# Altium PCB manip-cam-mod-pcb.PcbDoc
Units mm, origin at the board's own origin, x right, y up, seen from the top; angles counter-clockwise.
Board outline 40 x 40 mm, 4 copper layers (Top Layer, Ground Plane, Power Plane, Bottom Layer), stack 0.844 mm thick; 31 components, 17 nets, 242 pads, 25 vias.
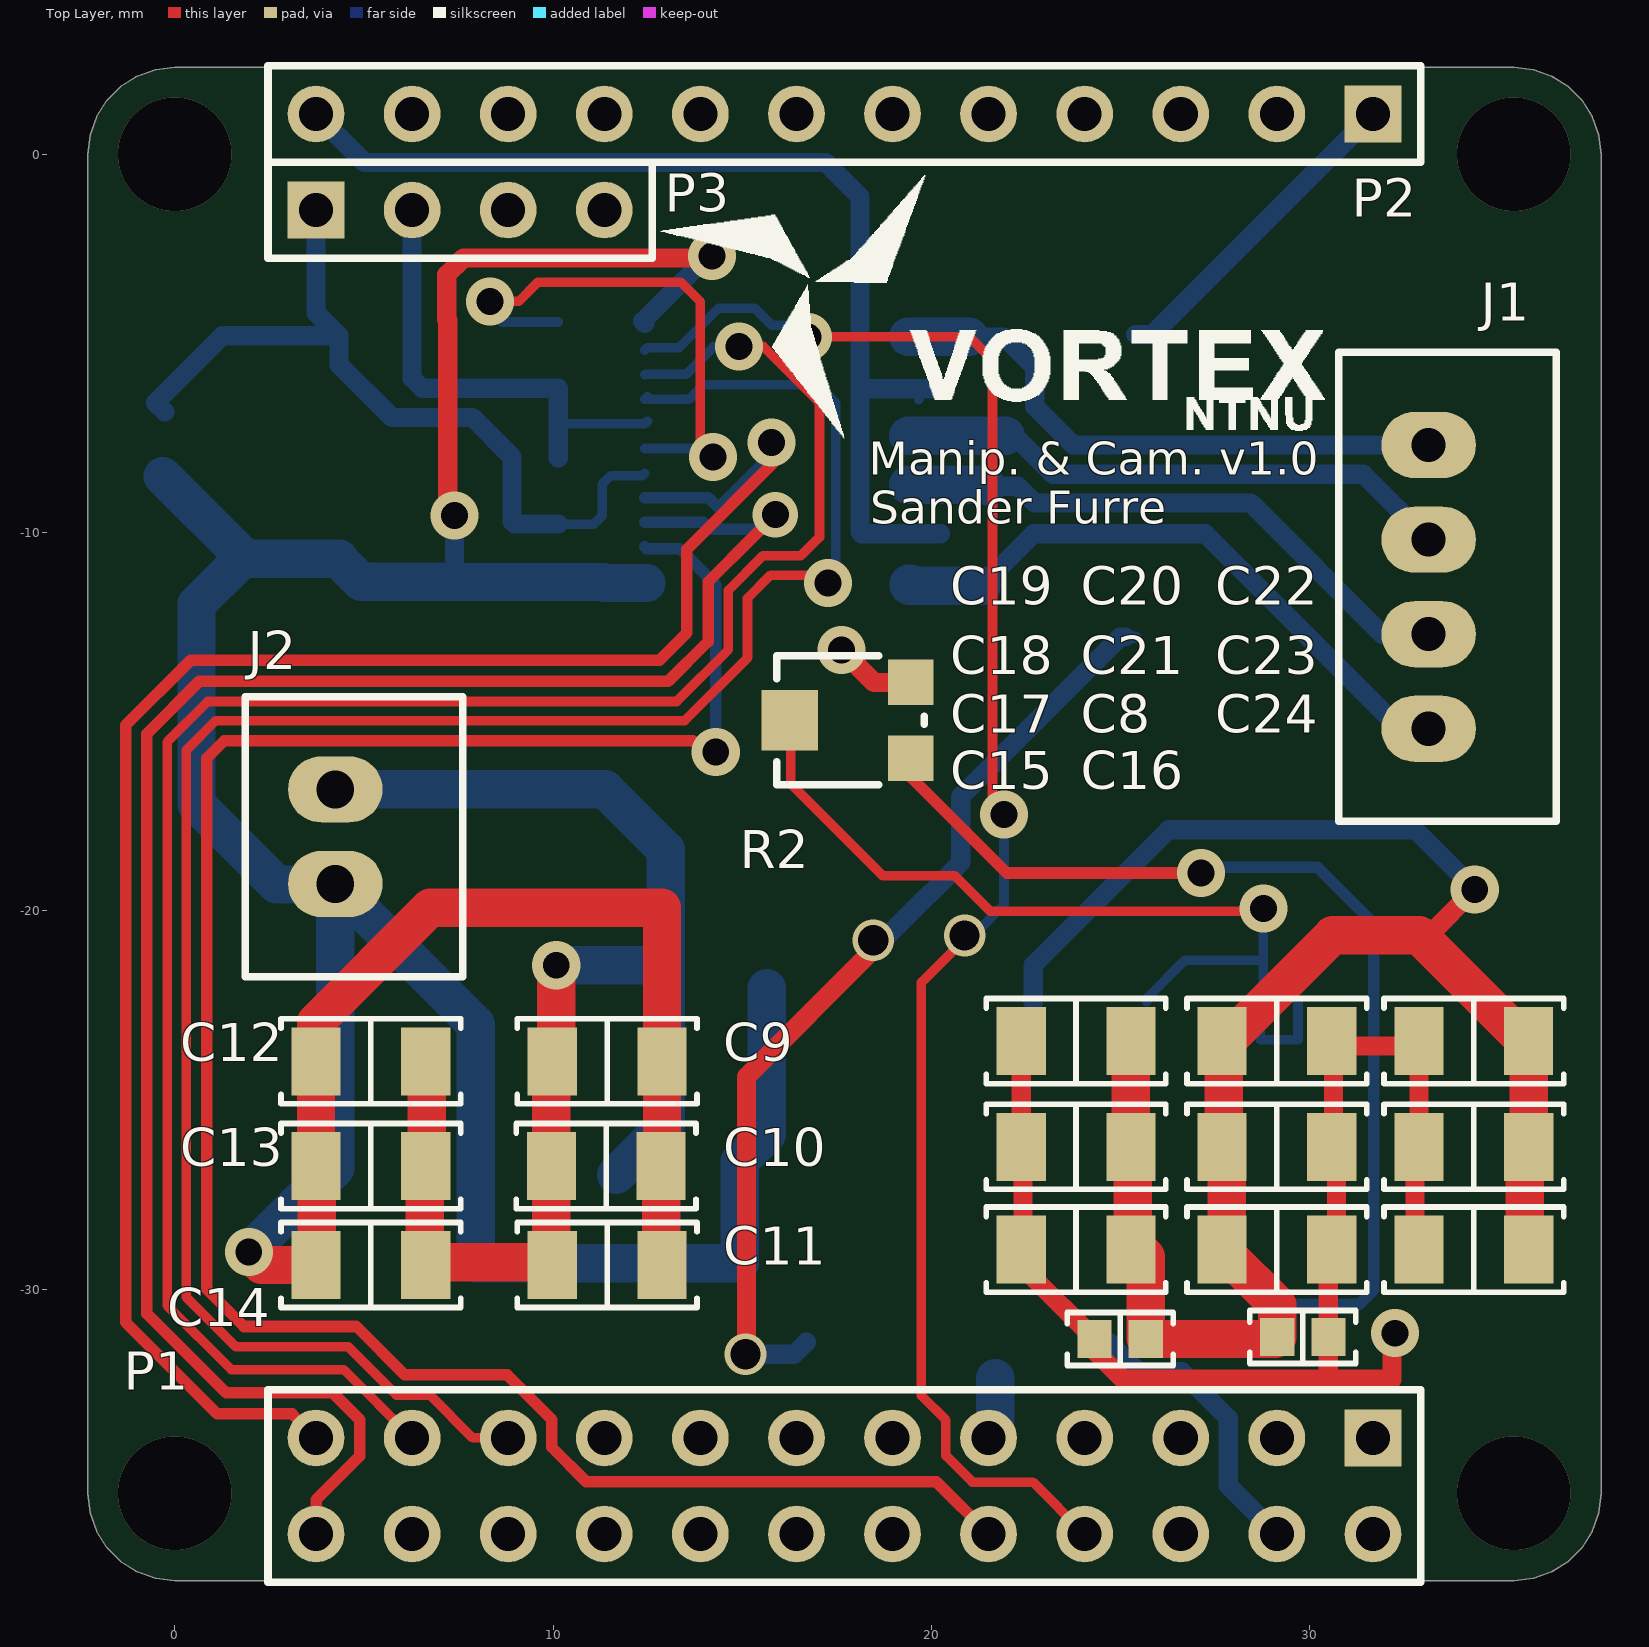
[diagram p0: Top Layer view]
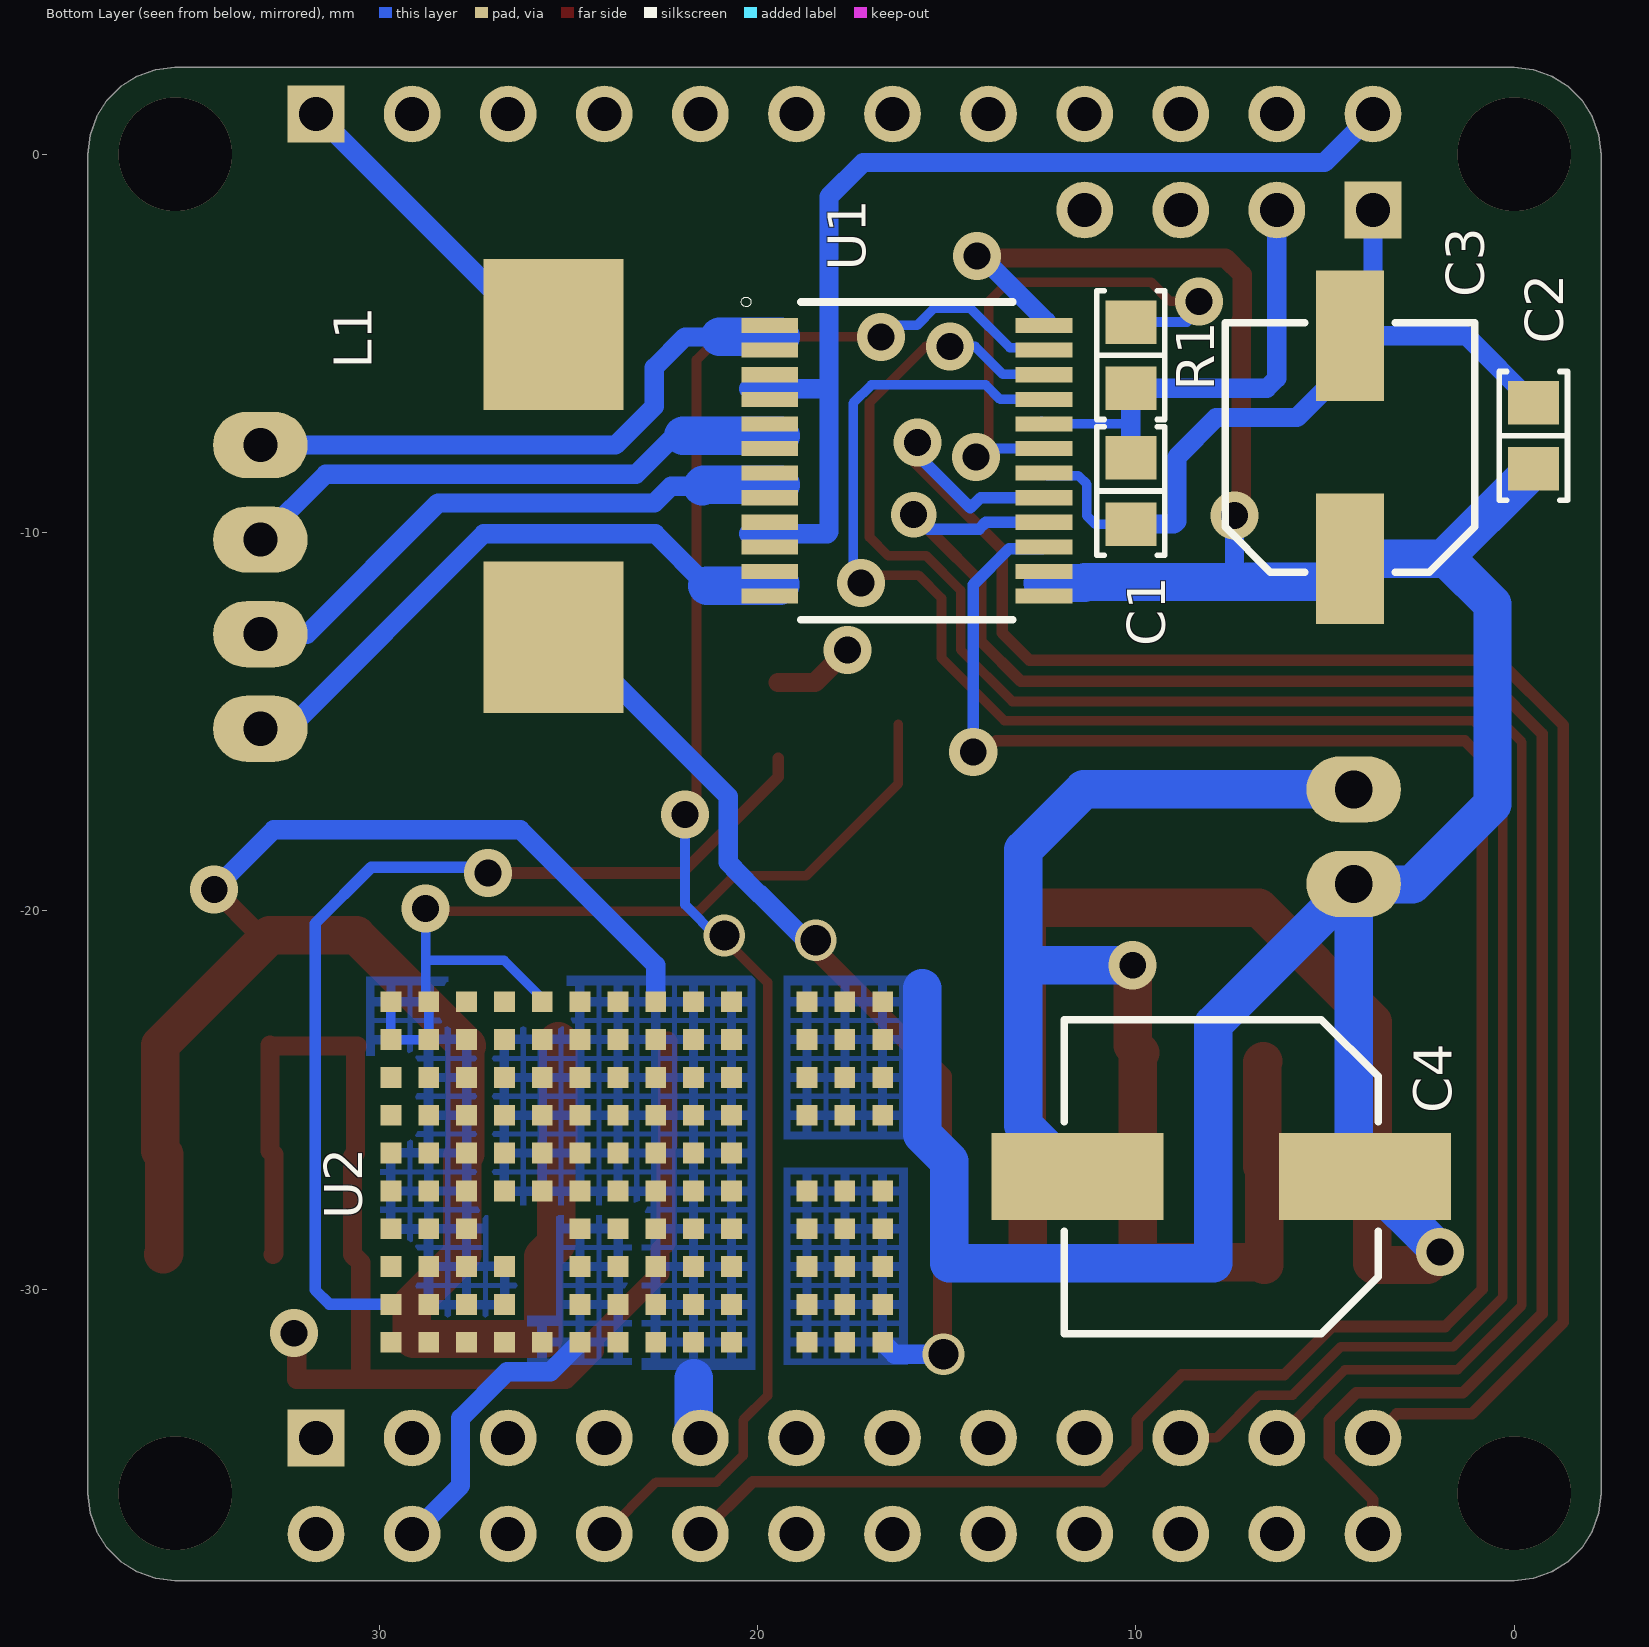
[diagram p1: Bottom Layer view, seen from below]
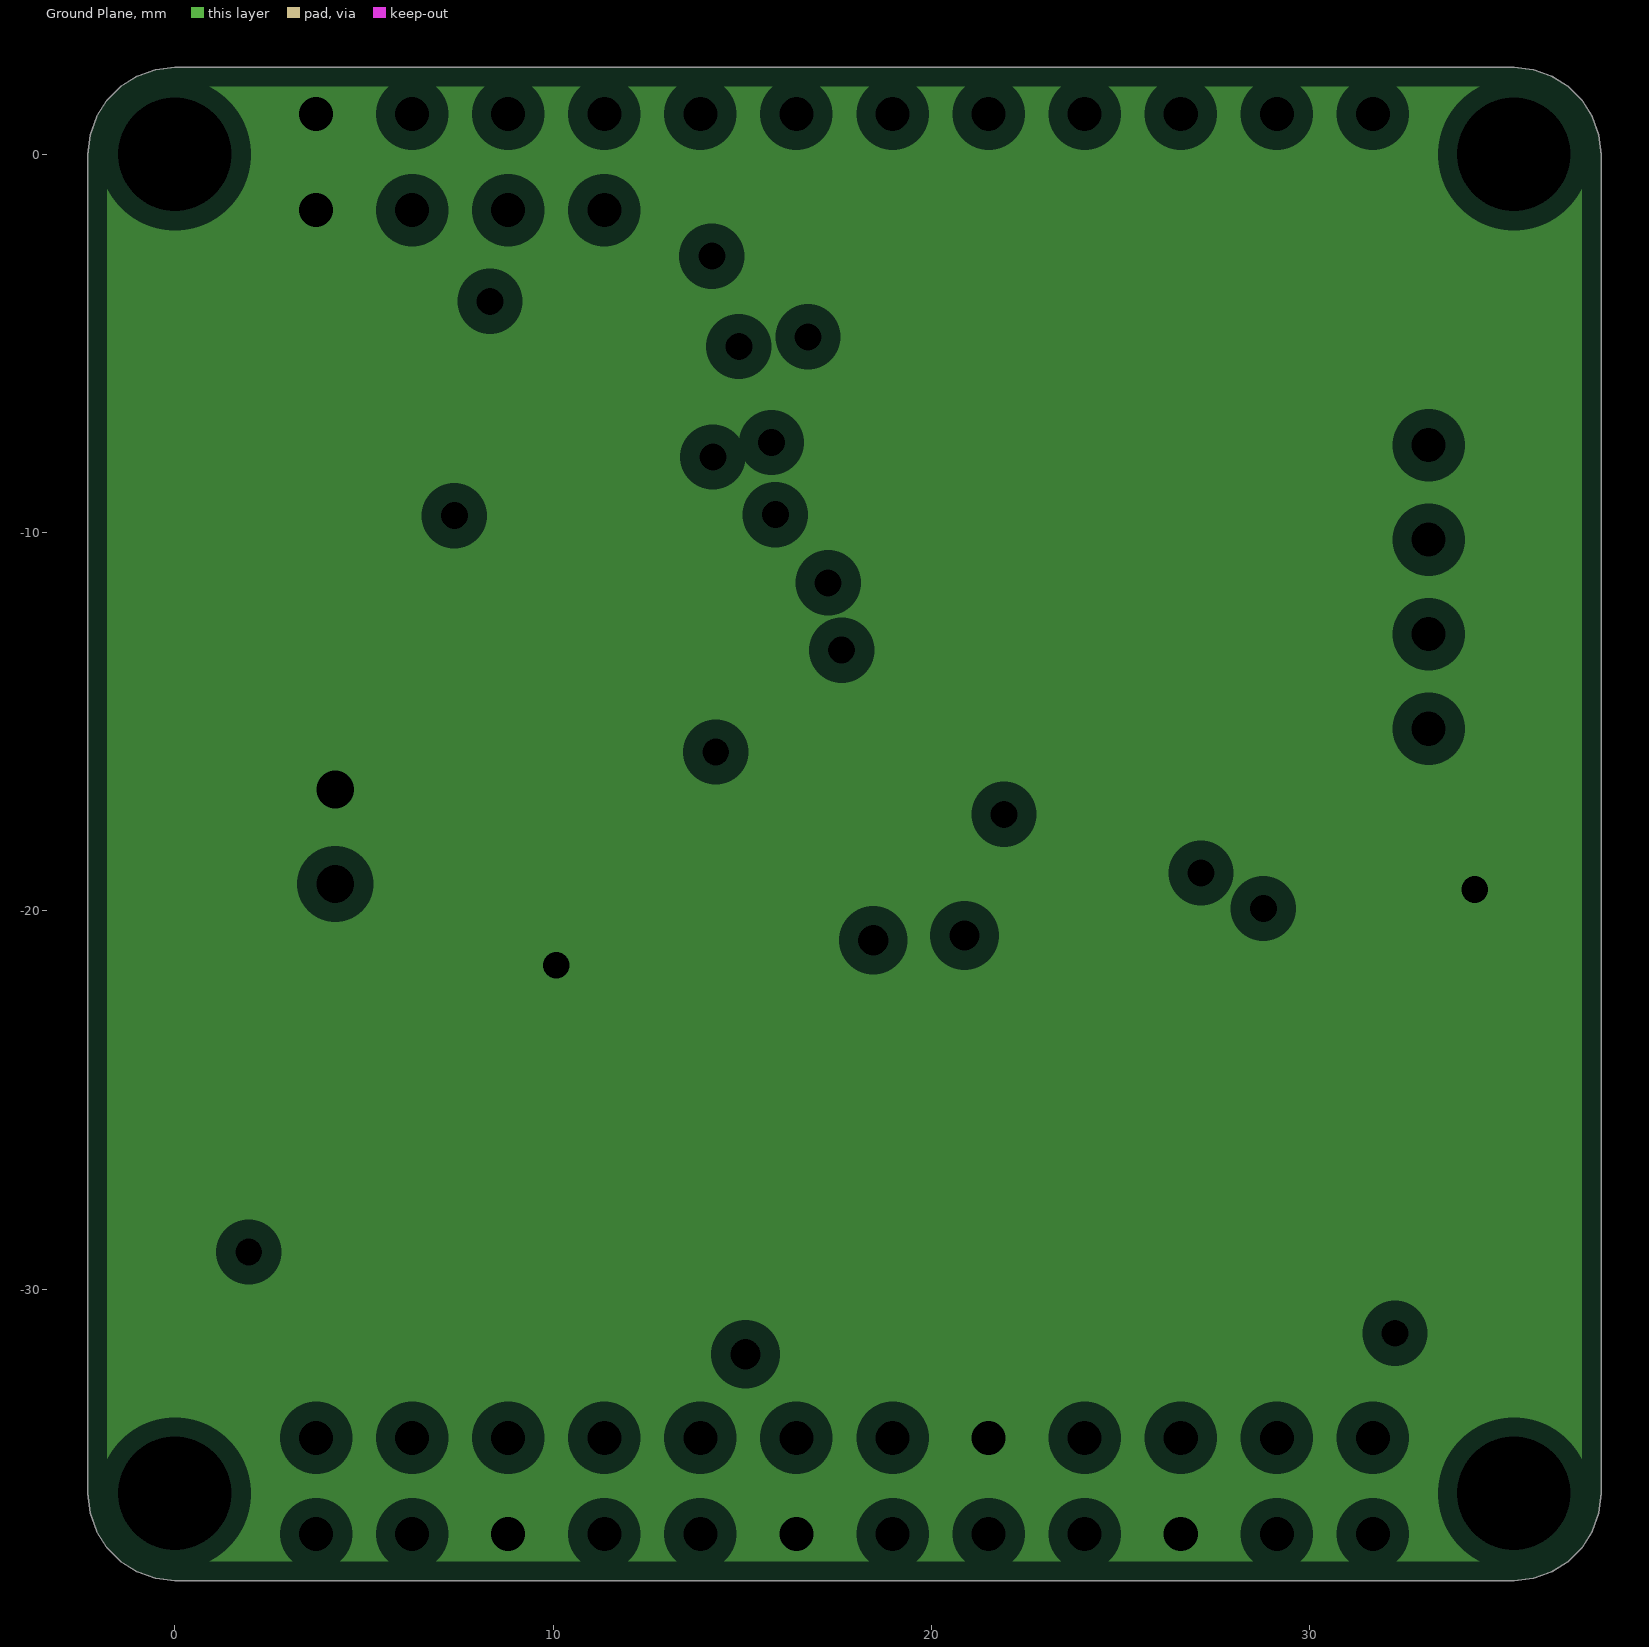
[diagram p2: Ground Plane, clearances drawn from the general rule]
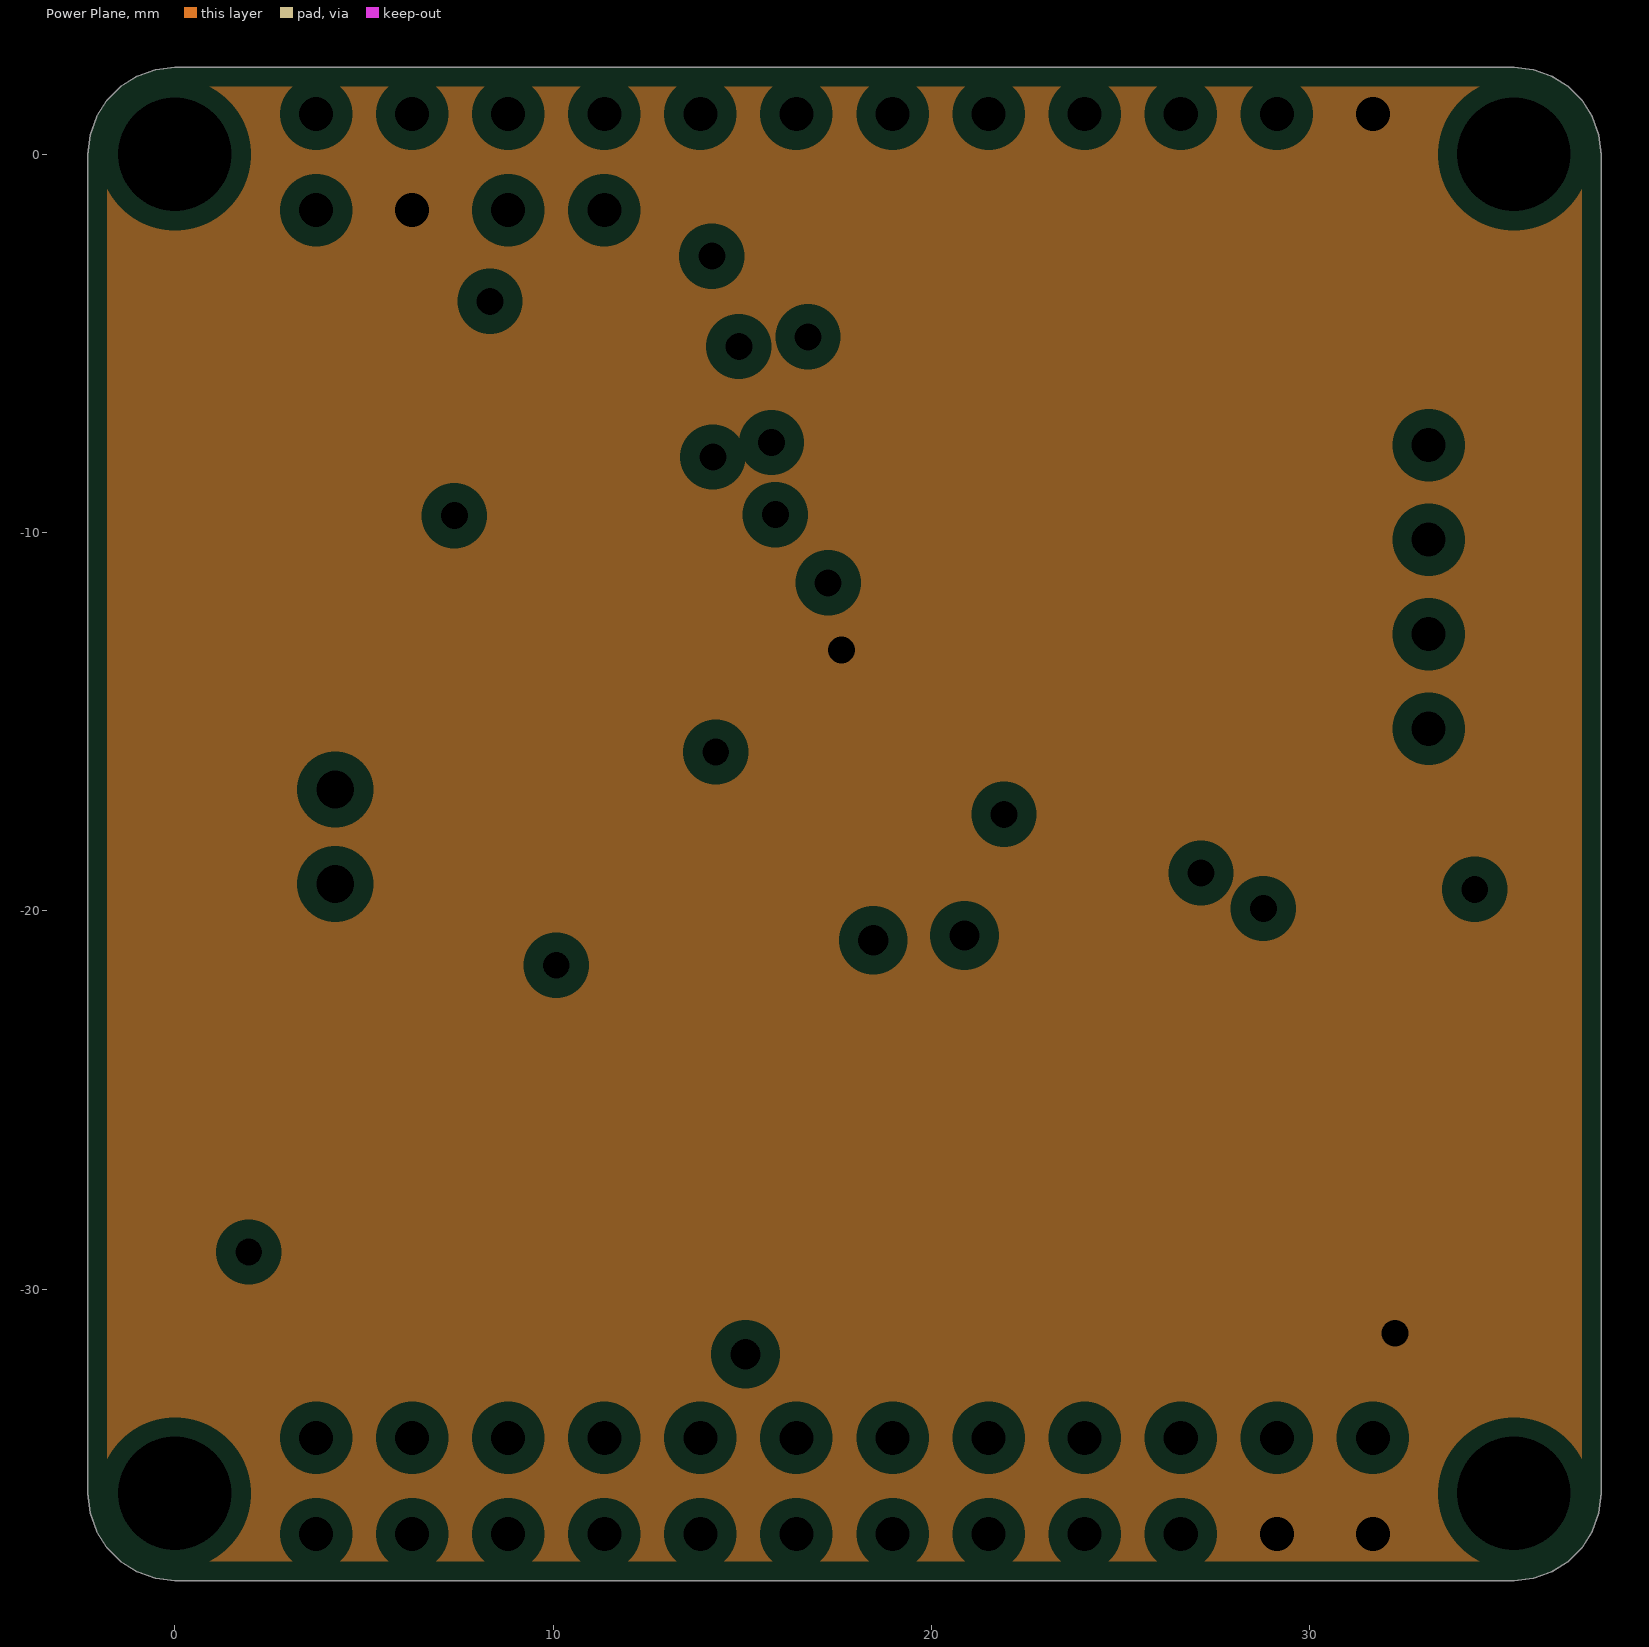
[diagram p3: Power Plane, clearances drawn from the general rule]
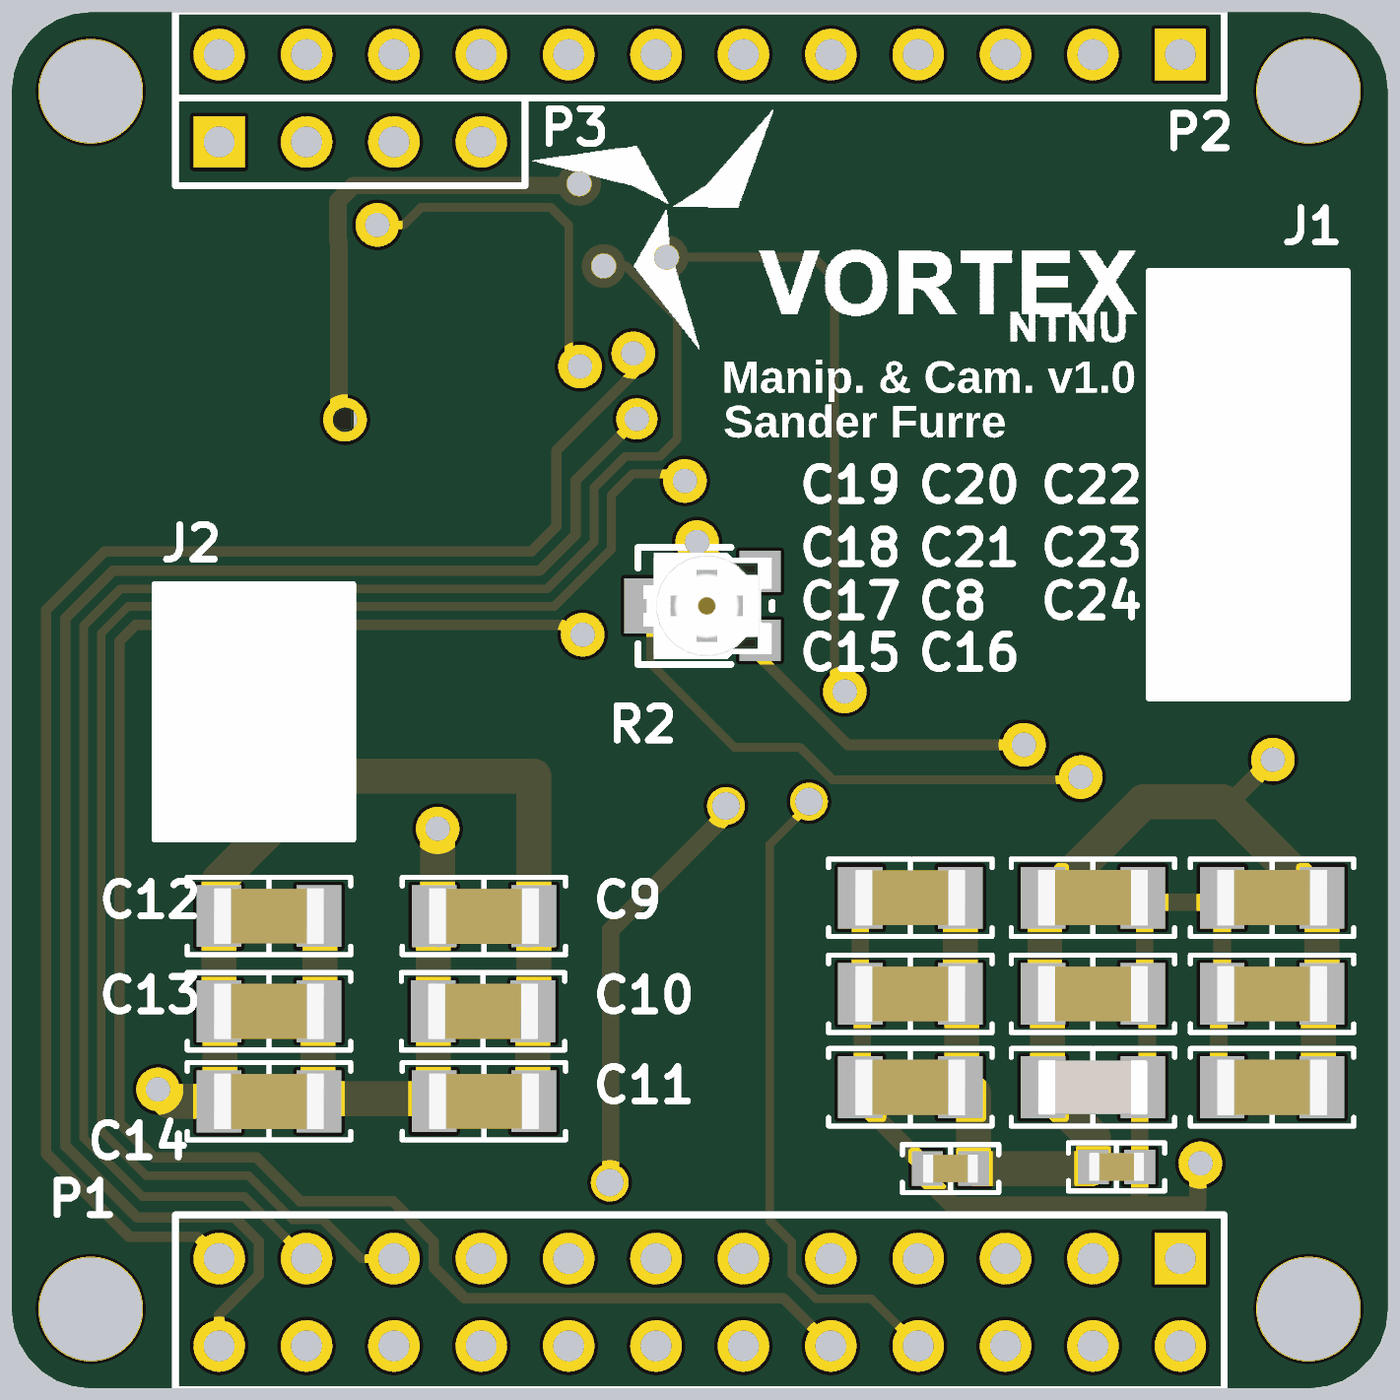
[diagram p4: 3D render of the assembled board from above, using the file's embedded part models]
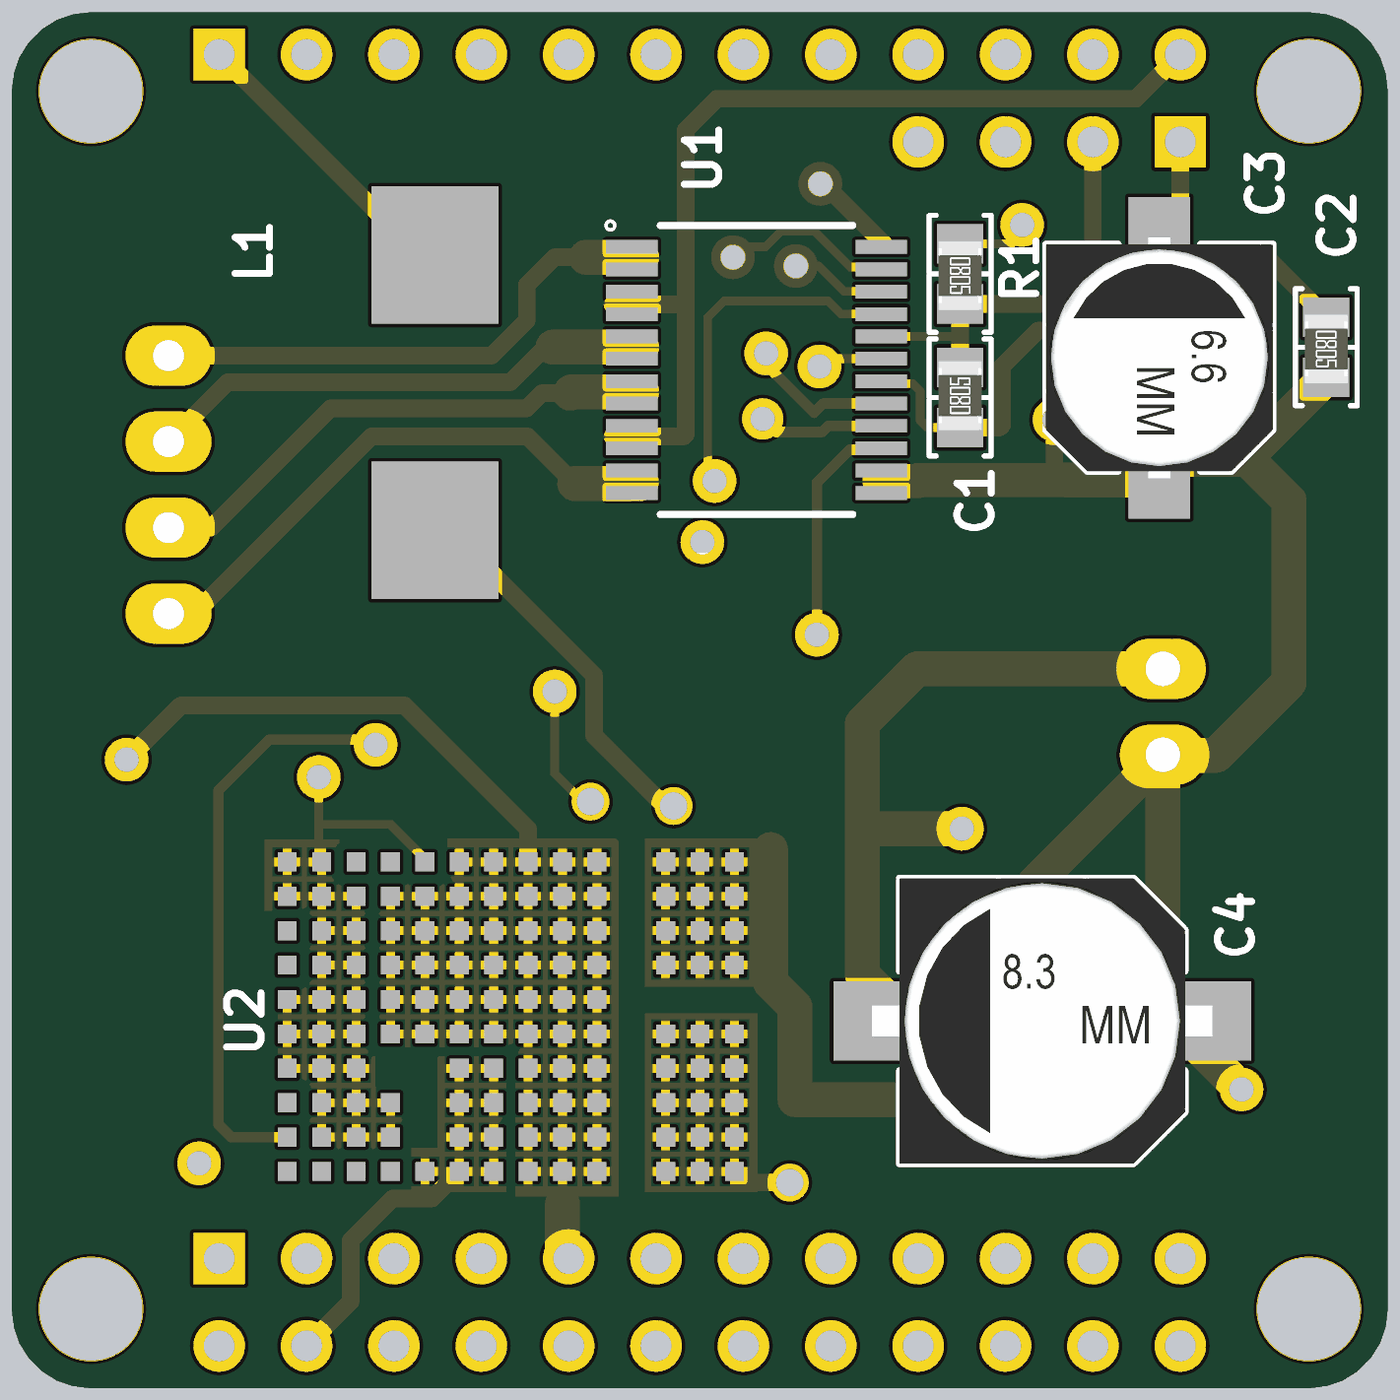
[diagram p5: 3D render of the assembled board from below, using the file's embedded part models]

## Layer stack, top to bottom
Top Solder: solder mask 0.0102, Solder Resist, Dk 3.5
Top Layer: signal copper 0.0356
Dielectric 1: core 0.32, FR-4, Dk 4.8
Ground Plane: plane copper 0.036, net GND
Dielectric 3: prepreg 0.127, Dk 4.2
Power Plane: plane copper 0.036, net +5V
Dielectric 4: core 0.254, Dk 4.2
Bottom Layer: signal copper 0.0356
Bottom Solder: solder mask 0.0102, Solder Resist, Dk 3.5

## Board outline
35.404,-37.704 35.916,-37.646 36.402,-37.476 36.838,-37.202 37.202,-36.838 37.476,-36.402 37.646,-35.916 37.704,-35.404 37.704,-0.004 37.646,0.508 37.476,0.994 37.202,1.43 36.838,1.794 36.402,2.068 35.916,2.239 35.404,2.296 0.004,2.296 -0.508,2.239 -0.994,2.068 -1.43,1.794 -1.794,1.43 -2.068,0.994 -2.239,0.508 -2.296,-0.004 -2.296,-35.404 -2.239,-35.916 -2.068,-36.402 -1.794,-36.838 -1.43,-37.202 -0.994,-37.476 -0.508,-37.646 0.004,-37.704

## Design rules (kind name [scope] priority, off if disabled: settings)
Clearance [All] p1: gap=0.254 ignorepadtopadclearanceinfootprint=FALSE except(0: Arc-Hole Track-Hole SMDPad-Hole THPad-Hole Via-Hole Fill-Hole Poly-Hole Region-Hole Text-Hole; 0.04: SMDPad-SMDPad)
PlaneClearance [All] p1: clearance=0.508
PlaneConnect [All] p1: planeconnectstyle=Relief reliefexpansion=0.508 reliefentries=4 reliefconductorwidth=0.254 reliefairgap=0.254
PolygonConnect [All] p1: thpad.connectstyle=Relief thpad.reliefconductorwidth=0.254 thpad.reliefentries=4 thpad.polygonreliefangle="90 Angle" thpad.airgapwidth=0.254 smdpad.connectstyle=Relief smdpad.reliefconductorwidth=0.254 smdpad.reliefentries=4 smdpad.polygonreliefangle="90 Angle" smdpad.airgapwidth=0.15 via.connectstyle=Relief via.reliefconductorwidth=0.254 via.reliefentries=4 via.polygonreliefangle="90 Angle" via.airgapwidth=0.254
RoutingVias "Routing Via Power" [(InNet('+5V') OR InNet('+12V') OR InNet('GND'))] p1: holewidth=0.711 width=1.27 viastyle="Through Hole" minholewidth=0.711 minwidth=1.27 maxholewidth=0.711 maxwidth=1.27
RoutingVias [All] p2: holewidth=0.6 width=0.9 viastyle="Through Hole" minholewidth=0.4 minwidth=0.6 maxholewidth=0.8 maxwidth=1.1
SolderMaskExpansion [All] p1: expansion=0.102
Width "Power supply stepper" [(InNet('NetJ1_1') OR InNet('NetJ1_2') OR InNet('NetJ1_3') OR InNet('NetJ1_4'))] p1: maxlimit=1.016 minlimit=0.254 preferedwidth=0.508
Width "Width power" [(InNet('+5V') OR InNet('+12V') OR InNet('GND'))] p2: maxlimit=1.016 minlimit=0.254 preferedwidth=0.508
Width [All] p3: maxlimit=0.508 minlimit=0.203 preferedwidth=0.254
28 further rules are at their usual default settings.

## Components (designator, comment, footprint, x,y, rotation, side; value= is the part's Value field where it differs from the comment)
C1 "0.1uF" "RES 0805/2012" 10.135,-8.901 r90 bottom
C2 "0.1uF" "RES 0805/2012" -0.508,-7.442 r270 bottom
C3 "22uF" "CAP ALUM 6.6MM" 4.343,-7.747 r90 bottom
C4 "100uF" "CAP ALUM 8.3MM" 7.747,-27.026 r0 bottom
C8 "0.10uF" "CAP 1206/3216 - 1.0MM" 29.134,-28.956 r0 top
C9 "22uF" "CAP 1206/3216" 11.43,-23.978 r0 top
C10 "22uF" "CAP 1206/3216" 11.405,-26.746 r0 top
C11 "22uF" "CAP 1206/3216" 11.43,-29.362 r0 top
C12 "22uF" "CAP 1206/3216" 5.182,-23.978 r180 top
C13 "22uF" "CAP 1206/3216" 5.182,-26.746 r180 top
C14 "22uF" "CAP 1206/3216" 5.182,-29.362 r180 top
C15 "1uF" "CAP 0603/1608" 24.994,-31.318 r180 top
C16 "1uF" "CAP 0603/1608" 29.82,-31.267 r0 top
C17 "47uF" "CAP 1206/3216" 23.825,-28.956 r180 top
C18 "47uF" "CAP 1206/3216" 23.825,-26.238 r180 top
C19 "47uF" "CAP 1206/3216" 23.825,-23.444 r180 top
C20 "47uF" "CAP 1206/3216" 29.134,-23.444 r0 top
C21 "47uF" "CAP 1206/3216" 29.134,-26.238 r0 top
C22 "47uF" "CAP 1206/3216" 34.341,-23.444 r180 top
C23 "47uF" "CAP 1206/3216" 34.341,-26.238 r180 top
C24 "47uF" "CAP 1206/3216" 34.341,-28.956 r180 top
J1 "B4B-XH-A(LF)(SN)" "JST XH B4B-XH-A" 33.147,-11.435 r90 top
J2 "B2B-XH-A(LF)(SN)" "JST XH B2B-XH-A" 4.242,-18.039 r90 top
L1 "FPV1006-150-R" FPV1006-150-R 25.4,-8.763 r90 bottom value=150nH
P1 "Header 12X2" HDR2X12 31.674,-33.934 r180 top locked
P2 "Header 12" HDR1X12 31.674,1.066 r180 top locked
P3 "Header 4" HDR1X4 3.734,-1.474 r0 top locked
R1 "10k" "RES 0805/2012" 10.135,-5.309 r270 bottom
R2 "500k" "POT Panasonic EVM" 17.908,-14.961 r90 top
U1 "TB6612FNG(O,C,8,EL)" SOP65P760X160-24N 16.053,-8.103 r180 bottom
U2 "PI3424-00-LGIZ" PI34xx-00 29.694,-31.403 r270 bottom

## Footprints (in the part's own frame and the unit in brackets; to place one, negate y for a bottom-side part, rotate by r counter-clockwise, add the part's x,y. Pads: shape width x height; smd on the part's side, far side on the other; paste and mask are expansions set on the pad)
"CAP 0603/1608" [mm] "Chip Capacitor, 2-Leads, Body 1.60x0.80mm, IPC Medium Density"
  rect 0.9x1 smd: 1(-0.675,0) 2(0.675,0)
  silkscreen extent -1.4,-0.7 1.4,0.7, body extent -0.8,-0.41 0.8,0.41, height 0.82
"CAP 1206/3216" [mm] "Chip Capacitor, 2-Leads, Body 3.25x1.60mm, IPC Medium Density"
  rect 1.3x1.8 smd: 1(-1.45,0) 2(1.45,0)
  silkscreen extent -2.37,-1.12 2.37,1.12, body extent -1.6,-0.81 1.6,0.81, height 1.62
"CAP 1206/3216 - 1.0MM" [mm] "Chip Capacitor, 2-Leads, Body 3.25x1.60mm, IPC Medium Density"
  rect 1.3x1.8 smd: 1(-1.45,0) 2(1.45,0)
  silkscreen extent -2.37,-1.12 2.37,1.12, body extent -1.6,-0.8 1.6,0.8, height 1
"CAP ALUM 6.6MM" [mm] "Aluminum Electrolytic Capacitor, Body 6.60x6.60x7.70mm, IPC Low Density"
  rect 3.45x1.8 smd: 1(-2.95,0) 2(2.95,0)
  silkscreen extent -3.3,-3.3 3.3,3.3, body extent -3.5,-3.3 3.5,3.3, height 7.7
"CAP ALUM 8.3MM" [mm] "Aluminum Electrolytic Capacitor, Body 8.30x8.30x10.50mm, IPC Low Density"
  rect 4.55x2.3 smd: 1(-3.8,0) 2(3.8,0)
  silkscreen extent -4.15,-4.15 4.15,4.15, body extent -4.95,-4.15 4.95,4.15, height 10.5
FPV1006-150-R [mm]
  rect 4x3.7 smd: 1(-4,0) 2(4,0)
  body extent -5.05,-4.2 5.05,4.2, height 6.4
HDR1X4 [mm] "Connector; Header; 4 Position"
  rect 1.5x1.5 hole 0.9: 1(0,0)
  round 1.5 hole 0.9: 2(2.54,0) 3(5.08,0) 4(7.62,0)
  silkscreen extent -1.27,-1.27 8.89,1.27
HDR1X12 [mm] "Connector; Header; 12 Position"
  rect 1.5x1.5 hole 0.9: 1(0,0)
  round 1.5 hole 0.9: 2(2.54,0) 3(5.08,0) 4(7.62,0) 5(10.16,0) 6(12.7,0) 7(15.24,0) 8(17.78,0) 9(20.32,0) 10(22.86,0) 11(25.4,0) 12(27.94,0)
  silkscreen extent -1.27,-1.27 29.21,1.27
HDR2X12 [mm] "Connector; Header; 12x2 Position"
  rect 1.5x1.5 hole 0.9: 1(0,0)
  round 1.5 hole 0.9: 2(0,2.54) 3(2.54,0) 4(2.54,2.54) 5(5.08,0) 6(5.08,2.54) 7(7.62,0) 8(7.62,2.54) 9(10.16,0) 10(10.16,2.54) 11(12.7,0) 12(12.7,2.54) 13(15.24,0) 14(15.24,2.54) 15(17.78,0) 16(17.78,2.54) 17(20.32,0) 18(20.32,2.54) 19(22.86,0) 20(22.86,2.54) 21(25.4,0) 22(25.4,2.54) 23(27.94,0) 24(27.94,2.54)
  silkscreen extent -1.27,-1.27 29.21,3.81
"JST XH B2B-XH-A" [mm]
  oval 1.75x2.5 hole 1: 1(-1.25,0) 2(1.25,0)
  silkscreen extent -3.7,-3.38 3.7,2.38, body extent -3.7,-3.38 3.7,2.38, height 7
"JST XH B4B-XH-A" [mm]
  oval 1.75x2.5 hole 0.9: 1(-3.75,0) 2(-1.25,0) 3(1.25,0) 4(3.75,0)
  silkscreen extent -6.2,-3.38 6.2,2.38, body extent -6.2,-3.38 6.2,2.38, height 7
PI34xx-00 [mm]
  rect 0.55x0.55 smd: ADJ(-1,0) ADR0(-6,0) ADR1(-7,0) EAO(0,1) EN(0,2) NC(-9,2) NC(0,3) PGD(0,0) PGND(-9,5) PGND(-9,6) PGND(-9,7) PGND(-9,8) PGND(-9,9) PGND(-8,3) PGND(-8,4) PGND(-8,5) PGND(-8,6) PGND(-8,7) PGND(-8,8) PGND(-8,9) PGND(-7,3) PGND(-7,4) PGND(-7,5) PGND(-7,6) PGND(-7,7) PGND(-7,8) PGND(-7,9) PGND(-6,3) PGND(-6,4) PGND(-6,5) PGND(-6,6) PGND(-6,7) PGND(-6,8) PGND(-6,9) PGND(-5,3) PGND(-5,4) PGND(-5,5) PGND(-5,6) PGND(-5,7) PGND(-5,8) PGND(-5,9) PGND(-4,3) PGND(-4,4) PGND(-4,5) PGND(-4,6) PGND(-4,7) PGND(-4,8) PGND(-4,9) PGND(-3,7) PGND(-3,8) PGND(-3,9) PGND(-2,7) PGND(-2,8) PGND(-2,9) PGND(-1,7) PGND(-1,8) PGND(-1,9) PGND(0,7) PGND(0,8) PGND(0,9) REM(0,4) SCL(-4,0) SDA(-3,0) SGND(-9,0) SGND(-9,1) SGND(-8,0) SGND(-8,1) SGND(-8,2) SGND(-7,1) SGND(-7,2) SGND(-6,1) SGND(-6,2) SGND(-5,0) SGND(-5,1) SGND(-5,2) SGND(-4,1) SGND(-4,2) SGND(-3,1) SGND(-3,2) SGND(-2,1) SGND(-2,2) SGND(-2,3) SGND(-1,1) SGND(-1,2) SGND(-1,3) SYNCI(-9,4) SYNCO(-9,3) TRK(-2,0) VIN(-9,11) VIN(-9,12) VIN(-9,13) VIN(-8,11) VIN(-8,12) VIN(-8,13) VIN(-7,11) VIN(-7,12) VIN(-7,13) VIN(-6,11) VIN(-6,12) VIN(-6,13) VOUT(-3,5) VOUT(-3,6) VOUT(-2,5) VOUT(-2,6) VOUT(-1,5) VOUT(-1,6) VOUT(0,5) VOUT(0,6) VS1(-4,11) VS1(-4,12) VS1(-4,13) VS1(-3,11) VS1(-3,12) VS1(-3,13) VS1(-2,11) VS1(-2,12) VS1(-2,13) VS1(-1,11) VS1(-1,12) VS1(-1,13) VS1(0,11) VS1(0,12) VS1(0,13)
  body extent -9.47,-0.52 0.52,13.47, height 2.56
"POT Panasonic EVM" [mm] "Panasonic EVM3Y 3.45mm x 3.10mm x 1.55mm"
  rect 1.2x1.2 smd: 1(-1,-1.55) 3(1,-1.55)
  rect 1.6x1.5 smd: 2(0,1.65)
  silkscreen extent -1.7,-1.9 1.7,2, body extent -1.55,-1.9 1.55,1.85, height 1.55
"RES 0805/2012" [mm] "Chip Resistor, 2-Leads, Body 2.00x1.25mm, IPC Medium Density"
  rect 1.15x1.35 smd: 1(-0.875,0) 2(0.875,0)
  silkscreen extent -1.7,-0.9 1.7,0.9, body extent -0.95,-0.62 1.05,0.63, height 0.6
SOP65P760X160-24N [mm]
  rect 1.5x0.4 smd: 1(-3.625,3.575) 2(-3.625,2.925) 3(-3.625,2.275) 4(-3.625,1.625) 5(-3.625,0.975) 6(-3.625,0.325) 7(-3.625,-0.325) 8(-3.625,-0.975) 9(-3.625,-1.625) 10(-3.625,-2.275) 11(-3.625,-2.925) 12(-3.625,-3.575) 13(3.625,-3.575) 14(3.625,-2.925) 15(3.625,-2.275) 16(3.625,-1.625) 17(3.625,-0.975) 18(3.625,-0.325) 19(3.625,0.325) 20(3.625,0.975) 21(3.625,1.625) 22(3.625,2.275) 23(3.625,2.925) 24(3.625,3.575)
  silkscreen extent -4.38,-4.2 2.8,4.33

## Part data
C1 C2: library part C2012X7R1H104K085AA, "CAP CER 0.1UF 50V X7R 0805", Device Package="0805 (2012 Metric)", Manufacturer="TDK Corporation", Supplier Part Number 1=445-7534-2-ND, TemperatureCoefficient=X7R, TemperatureRange="-55C ~ 125C", Tolerance=10%, Voltage=50V, ComponentLink1Description=Datasheet, ComponentLink1URL=https://product.tdk.com/info/en/catalog/datasheets/mlcc_commercial_general_en.pdf, ComponentLink2Description="Digi-Key listing", ComponentLink2URL=http://digikey.com/product-detail/en/C2012X7R1H104K085AA/445-7534-2-ND/2732969, PartId=4390, Part Number=C2012X7R1H104K085AA, Price=0,0182, Supplier 1=Digi-Key, Type=-
C3: library part EEE-1EA220AP, "CAP ALUM 22UF 20% 25V SMD", Device Package="Radial, Can - SMD", Lifetime @ Temp="2000 Hrs @ 85C", Manufacturer="Panasonic Electronic Components", Ripple Current=55mA, Supplier Part Number 1=PCE4596TR-ND, TemperatureRange="-40C ~ 85C", Tolerance=20%, Voltage=25V, ComponentLink1Description=Datasheet, ComponentLink1URL=http://media.digikey.com/pdf/Data%20Sheets/Panasonic%20Electronic%20Components/S_Series_Type_V.pdf, ComponentLink2Description="Digi-Key listing", ComponentLink2URL=http://digikey.com/product-detail/en/EEE-1EA220AP/PCE4596TR-ND/1717762, Impedance=-, PartId=7220, Part Number=EEE-1EA220AP, Price=0,1368, Supplier 1=Digi-Key, Type="High Temperature Reflow"
C4: library part EEE-1EA101UP, "CAP ALUM 100UF 20% 25V SMD", Device Package="Radial, Can - SMD", Lifetime @ Temp="2000 Hrs @ 85C", Manufacturer="Panasonic Electronic Components", Ripple Current=91mA, Supplier Part Number 1=PCE3897TR-ND, TemperatureRange="-40C ~ 85C", Tolerance=20%, Voltage=25V, ComponentLink1Description=Datasheet, ComponentLink1URL=http://media.digikey.com/pdf/Data%20Sheets/Panasonic%20Electronic%20Components/S_Series_Type_V.pdf, ComponentLink2Description="Digi-Key listing", ComponentLink2URL=http://digikey.com/product-detail/en/EEE-1EA101UP/PCE3897TR-ND/766064, Impedance=-, PartId=7309, Part Number=EEE-1EA101UP, Price=0,1761, Supplier 1=Digi-Key, Type=Automotive
C8: library part GRM319R71H104KA01D, "CAP CER 0.1UF 50V X7R 1206", Device Package="1206 (3216 Metric)", Manufacturer="Murata Electronics North America", Supplier Part Number 1=490-1775-2-ND, TemperatureCoefficient=X7R, TemperatureRange="-55C ~ 125C", Tolerance=10%, Voltage=50V, ComponentLink1Description=Datasheet, ComponentLink1URL=http://www.murata.com/~/media/webrenewal/support/library/catalog/products/capacitor/mlcc/c02e.pdf, ComponentLink2Description="Digi-Key Listing", ComponentLink2URL=https://www.digikey.com/product-detail/en/murata-electronics-north-america/GRM319R71H104KA01D/490-1775-2-ND/586815, PartId=16942, Part Number=GRM319R71H104KA01D, Price=0,0231, Supplier 1=Digi-Key
C9 C10 C11 C12 C13 C14: library part GRM31CR61E226KE15L, "CAP CER 22UF 25V X5R 1206", Device Package="1206 (3216 Metric)", Manufacturer="Murata Electronics North America", Supplier Part Number 1=490-5527-2-ND, TemperatureCoefficient=X5R, TemperatureRange="-55C ~ 85C", Tolerance=10%, Voltage=25V, ComponentLink1Description=Datasheet, ComponentLink1URL=http://www.murata.com/~/media/webrenewal/support/library/catalog/products/capacitor/mlcc/c02e.pdf, ComponentLink2Description="Digi-Key Listing", ComponentLink2URL=https://www.digikey.com/product-detail/en/murata-electronics-north-america/GRM31CR61E226KE15L/490-5527-2-ND/2334878, PartId=15793, Part Number=GRM31CR61E226KE15L, Price=0,1785, Supplier 1=Digi-Key
C15 C16: library part GRM188R71C105KA12D, "CAP CER 1UF 16V X7R 0603", Device Package="0603 (1608 Metric)", Manufacturer="Murata Electronics North America", Supplier Part Number 1=490-3900-2-ND, TemperatureCoefficient=X7R, TemperatureRange="-55C ~ 125C", Tolerance=10%, Voltage=16V, ComponentLink1Description=Datasheet, ComponentLink1URL=http://www.murata.com/~/media/webrenewal/support/library/catalog/products/capacitor/mlcc/c02e.pdf, ComponentLink2Description="Digi-Key Listing", ComponentLink2URL=https://www.digikey.com/product-detail/en/murata-electronics-north-america/GRM188R71C105KA12D/490-3900-2-ND/965914, PartId=12965, Part Number=GRM188R71C105KA12D, Price=0,014, Supplier 1=Digi-Key
C17 C18 C19 C20 C21 C22 C23 C24: library part GRM31CR61A476ME15L, "CAP CER 47UF 10V X5R 1206", Device Package="1206 (3216 Metric)", Manufacturer="Murata Electronics North America", Supplier Part Number 1=490-5528-2-ND, TemperatureCoefficient=X5R, TemperatureRange="-55C ~ 85C", Tolerance=20%, Voltage=10V, ComponentLink1Description=Datasheet, ComponentLink1URL=http://www.murata.com/~/media/webrenewal/support/library/catalog/products/capacitor/mlcc/c02e.pdf, ComponentLink2Description="Digi-Key Listing", ComponentLink2URL=https://www.digikey.com/product-detail/en/murata-electronics-north-america/GRM31CR61A476ME15L/490-5528-2-ND/2334879, PartId=15800, Part Number=GRM31CR61A476ME15L, Price=0,2053, Supplier 1=Digi-Key
J1: "CONN HEADER XH TOP 4POS 2.5MM", Colour=Natural, Manufacturer="JST Sales America Inc.", Supplier Part Number 1=455-2249-ND, ComponentLink1Description=Datasheet, ComponentLink1URL=http://www.jst-mfg.com/product/pdf/eng/eXH.pdf, ComponentLink2Description="Digi-Key Listing", ComponentLink2URL=http://www.digikey.com/product-detail/en/jst-sales-america-inc/B4B-XH-A(LF)(SN)/455-2249-ND/1651047, Contact Finish=Tin, Fastening Type="Detent Lock", Number Of Positions=4, Number Of Rows=1, PartId=16451, Part Number=B4B-XH-A(LF)(SN), Pitch="0.098\" (2.50mm)", Price=0,21, Series=XH, Supplier 1=Digi-Key, Type="Header, Shrouded"
J2: "CONN HEADER XH TOP 2POS 2.5MM", Colour=Natural, Part Number=B2B-XH-A(LF)(SN)
L1: "FIXED IND 150NH 25A 0.41 MOHM", Supplier Part Number 1=283-4578-2-ND, ComponentLink1Description="Manufacturer Link", ComponentLink1URL=http://www.eaton.no/EatonNO/index.htm, ComponentLink2Description=Datasheet, ComponentLink2URL=http://www.cooperindustries.com/content/dam/public/bussmann/Electronics/Resources/product-datasheets/bus-elx-ds-10390-fpv1006.pdf, Irms=25, Part Number=FPV1006-150-R, Supplier 1=Digi-Key
P1: "Header, 12-Pin, Dual row", LatestRevisionDate=17-Jul-2002, LatestRevisionNote="Re-released for DXP Platform.", Publisher="Altium Limited"
P2: "Header, 12-Pin", LatestRevisionDate=17-Jul-2002, LatestRevisionNote="Re-released for DXP Platform.", Publisher="Altium Limited"
P3: "Header, 4-Pin", LatestRevisionDate=17-Jul-2002, LatestRevisionNote="Re-released for DXP Platform.", Publisher="Altium Limited"
R1: library part ERA-6AEB103V, "RES SMD 10K OHM 0.1% 1/8W 0805", Device Package="0805 (2012 Metric)", Manufacturer="Panasonic Electronic Components", PowerRating="0.125W, 1/8W", Supplier Part Number 1=P10KDATR-ND, TemperatureCoefficient=25ppm/C, TemperatureRange="-55C ~ 155C", Tolerance=0.1%, ComponentLink1Description=Datasheet, ComponentLink1URL=http://industrial.panasonic.com/lecs/www-data/pdf/AOA0000/AOA0000CE26.pdf, ComponentLink2Description="Digi-Key listing", ComponentLink2URL=http://digikey.com/product-detail/en/ERA-6AEB103V/P10KDATR-ND/1465773, PartId=2446, Part Number=ERA-6AEB103V, Price=0,0653, Supplier 1=Digi-Key, Type="Thin Film"
R2: library part EVM-3YSX50B55, "TRIMMER 500K OHM 0.15W SMD", Manufacturer="Panasonic Electronic Components", PowerRating=0.15W, Supplier Part Number 1=P3Y504TR-ND, TemperatureCoefficient=250ppm/C, Tolerance=25%, Adjustment Type="Top Adjustment", ComponentLink1Description=Datasheet, ComponentLink1URL=http://media.digikey.com/pdf/Data%20Sheets/Panasonic%20Resistors%20Thermistors%20PDFs/EVM-3Y_S_R_Rev2010.pdf, ComponentLink2Description="Digi-Key Listing", ComponentLink2URL=http://www.digikey.ca/product-detail/en/EVM-3YSX50B55/P3Y504TR-ND/259783, Number Of Turns=Single, PartId=7181, Part Number=EVM-3YSX50B55, Price=0,2543, Supplier 1=Digi-Key, Type="Surface Mount"
U1: library part TB6612FNG(O,C,8,EL, "Stepping Motor Driver Ic Unipolor Copper Wire 8", Package="SSOP-24 Toshiba", Availability=Good, ComponentLink2URL=https://www.digikey.com/product-detail/en/toshiba-semiconductor-and-storage/TB6612FNGC8EL/TB6612FNGC8ELCT-ND/1730134, MF=Toshiba, MP=TB6612FNG(O,C,8,EL, Price="2.11 USD"
U2: Supplier Part Number 1=1102-1641-ND, ComponentLink1Description="Manufacturer Link", ComponentLink1URL=http://www.vicorpower.com/, ComponentLink2Description=Datasheet, ComponentLink2URL=http://vicorpower.com/documents/datasheets/Picor/ds_pi34xx-00.pdf, Iout,max=15A, Part Number=PI3424-00-LGIZ, Supplier 1=Digi-Key, Vin,max=18V, Vin,min=8V, Vout,nom=5V

## Via types
v1: diameter 1.27, hole 0.711, Top Layer to Bottom Layer, 14 vias
v2: diameter 3, hole 3, Top Layer to Bottom Layer, 4 vias
v3: diameter 1.27, hole 0.711, Top Layer to Bottom Layer, tented both sides, 3 vias
v4: diameter 1.1, hole 0.8, Top Layer to Bottom Layer, 3 vias
v5: diameter 1.2, hole 0.711, Top Layer to Bottom Layer, 1 vias

## Nets (pads, with @x,y where several pads share a name; then routed paths per layer and width w, separated by ;. In a path a pad name is that pad's centre, name@x,y a point inside that pad or via, vN(x,y) a via of type N, cw(c..) or ccw(c..) an arc to the next point about the centre after c; other vN are vias at no path point)
+5V: C1.2 C8.2 C15.2 C16.2 C17.2 C18.2 C19.2 C20.2 C21.2 C22.2 C23.2 C24.2 L1.2 P1.2 P1.4 P2.1 P3.2 R1.2 R2.3 U1.20 U2.REM U2.VOUT | length 66.8
  Top Layer w0.508: v1(17.628,-13.106) 18.482,-13.961 R2.3 ; C19.2 22.375,-26.187 22.426,-26.238 22.426,-28.804 22.578,-28.956 22.578,-29.578 C15.2 24.319,-31.637 25.067,-32.385 30.505,-32.385 ; C16.2 30.495,-32.374 30.505,-32.385 ; C16.2@30.495,-31.242 30.495,-29.299 30.711,-29.083 30.711,-26.492 30.635,-26.416 30.635,-23.622 30.584,-23.571 32.865,-23.571 32.891,-23.546 32.891,-26.34 32.789,-26.441 32.789,-29.058 C24.2@32.815,-29.083 ; v1(32.258,-31.166) 32.182,-31.242 32.182,-32.385 30.505,-32.385
  Bottom Layer w0.254: 10.135,-7.163 10.17,-7.128 U1.20 U1.20@12.497,-7.059
  Bottom Layer w0.508: P3.2 6.274,-5.918 6.539,-6.184 R1.2 10.135,-7.163 C1.2 ; U2.VOUT@24.694,-31.403 25.477,-32.186 26.625,-32.186 27.852,-33.413 27.852,-35.192 P1.4 ; L1.2 25.845,-4.763 P2.1 ; v1@31.878,-31.166 v1(32.258,-31.166)
+12V: C2.2 C3.1 C4.1 C9.2 C10.2 C11.2 C12.2 C13.2 C14.2 J2.1 U1.13 U1.14 U1.24 U2.VIN | length 108.6
  Top Layer w0.508: v1(7.391,-9.55) v1@7.214,-9.55 ; v3(14.199,-2.692) 14.148,-2.743 7.629,-2.743 7.188,-3.184 7.188,-4.36 7.214,-4.385 v1@7.214,-9.55 ; v1@7.214,-9.55 7.036,-9.55 7.214,-9.728 v1@7.214,-9.55
  Top Layer w1.016: v1(1.956,-29.017) 2.301,-29.362 3.706,-29.362 3.757,-29.312 3.757,-26.746 3.732,-26.721 C12.2 3.732,-22.938 6.756,-19.914 12.88,-19.914 C9.2 12.88,-26.568 12.855,-26.594 C10.2 12.855,-29.261 C11.2@12.88,-29.286
  Bottom Layer w0.508: 7.036,-11.303 7.01,-11.278 7.391,-10.897 v1(7.391,-9.55) ; U1.24@12.428,-4.47 12.37,-4.412 14.089,-2.692 v3(14.199,-2.692)
  Bottom Layer w1: 7.036,-11.303 11.337,-11.303 11.365,-11.332 12.475,-11.332
  Bottom Layer w1.016: C2.2@-0.316,-8.509 1.872,-10.697 C3.1 ; 1.753,-10.719 0.573,-11.898 0.573,-17.185 2.692,-19.304 J2.1@3.937,-19.304 ; v1(1.956,-29.017) C4.1 ; C4.1@4.074,-26.975 4.242,-26.807 J2.1 7.95,-22.998 7.95,-29.312 14.935,-29.312 14.935,-26.619 15.646,-25.908 15.646,-22.047 ; C3.1@4.547,-10.922 4.928,-11.303 7.036,-11.303
GND: C1.1 C2.1 C3.2 C4.2 C8.1 C9.1 C10.1 C11.1 C12.1 C13.1 C14.1 C15.1 C16.1 C17.1 C18.1 C19.1 C20.1 C21.1 C22.1 C23.1 C24.1 J2.2 P1.6 P1.9 P1.14 P1.20 P2.12 P3.1 U1.3 U1.4 U1.9 U1.10 U1.18 U2.PGND | length 143.1
  Top Layer w0.508: 32.895,-20.65 33.147,-20.65 v1(34.366,-19.431)
  Top Layer w1.016: C12.1 6.657,-24.003 6.657,-26.746 6.606,-26.797 6.606,-29.362 6.682,-29.286 9.98,-29.286 9.955,-29.261 C10.1 9.955,-23.825 9.881,-23.751 10.084,-23.548 v1(10.084,-21.438) ; C19.1 25.275,-26.187 25.326,-26.238 25.326,-28.804 25.669,-29.146 C15.1 29.094,-31.318 C16.1 29.145,-30.417 27.811,-29.083 27.811,-26.492 27.735,-26.416 27.735,-23.622 27.684,-23.571 30.605,-20.65 32.895,-20.65 35.791,-23.546 35.791,-26.34 35.689,-26.441 35.689,-29.058 C24.1@35.715,-29.083
  Bottom Layer w0.254: C1.1 11.079,-9.776 11.297,-9.559 11.297,-8.72 11.52,-8.497 12.359,-8.497 U1.18 ; U1.4@19.667,-6.488 U1.4
  Bottom Layer w0.508: C2.1@-0.268,-6.807 C2.1 1.262,-4.797 C3.2 3.734,-4.187 P3.1 ; P2.12 5.016,-0.216 17.208,-0.216 18.11,-1.118 18.11,-6.223 ; C3.2@4.343,-4.826 4.343,-5.563 5.74,-6.96 7.873,-6.96 8.915,-8.002 8.915,-9.703 8.989,-9.776 C1.1 ; 20.244,-10.033 18.161,-10.033 18.11,-9.982 18.11,-6.223 ; 20.244,-6.198 18.136,-6.198 18.11,-6.223 ; U2.PGND@22.694,-22.403 22.694,-21.438 26.276,-17.856 32.791,-17.856 v1(34.366,-19.431)
  Bottom Layer w1.016: J2.2 11.379,-16.789 12.979,-18.39 12.979,-21.387 ; v1(10.084,-21.438) 12.929,-21.438 12.979,-21.387 ; C4.2@11.674,-26.975 12.979,-25.669 12.979,-21.387 ; P1.9 21.694,-33.753 21.694,-32.36
NetJ1_1: J1.1 U1.11 U1.12 | length 16.5
  Bottom Layer w0.508: 21.336,-11.405 22.708,-10.033 27.238,-10.033 32.391,-15.185 J1.1
  Bottom Layer w1.016: 19.456,-11.354 19.406,-11.354 19.406,-11.39 19.42,-11.405 21.336,-11.405
NetJ1_2: J1.2 U1.7 U1.8 | length 15.4
  Bottom Layer w0.508: 21.467,-8.776 22.288,-8.776 22.733,-9.22 28.448,-9.22 31.913,-12.685 J1.2
  Bottom Layer w1.016: 19.391,-8.74 21.431,-8.74 21.467,-8.776
NetJ1_3: J1.3 U1.5 U1.6 | length 14.8
  Bottom Layer w0.508: 22.022,-7.493 22.25,-7.493 23.216,-8.458 31.42,-8.458 J1.3
  Bottom Layer w1.016: 19.391,-7.44 21.968,-7.44
NetJ1_4: J1.4 U1.1 U1.2 | length 15.5
  Bottom Layer w0.508: 21.006,-4.826 21.92,-4.826 22.733,-5.639 22.733,-6.664 23.754,-7.685 J1.4
  Bottom Layer w1.016: 19.391,-4.826 21.006,-4.826
NetL1_1: L1.1 U2.VS1 | length 25.4
  Top Layer w0.508: v4(15.088,-31.725) 15.113,-31.699 15.113,-24.384 18.466,-21.031 v4(18.466,-20.777)
  Bottom Layer w0.305: L1.1@25.134,-12.763 L1.1
  Bottom Layer w0.508: v4(15.088,-31.725) 16.373,-31.725 U2.VS1@16.694,-31.403 ; v4(18.466,-20.777) 18.72,-20.777 19.939,-19.558 19.955,-19.558 20.625,-18.888 20.625,-18.872 20.777,-18.72 20.777,-16.976 24.991,-12.763 L1.1@25.134,-12.763
NetP1_8: P1.8 U1.23 | length 45.8
  Top Layer w0.254: v3(16.739,-4.826) 21.006,-4.826 21.615,-5.436 21.615,-17.653 21.819,-17.45 v1(21.92,-17.45) ; v4(20.879,-20.65) 20.879,-20.752 19.736,-21.895 19.736,-32.818 20.383,-33.465 20.383,-34.402 21.083,-35.102 22.682,-35.102 P1.8
  Bottom Layer w0.254: U1.23 12.497,-5.109 13.336,-5.109 14.38,-4.064 15.331,-4.064 15.788,-4.521 16.662,-4.521 16.662,-4.75 v3(16.739,-4.826) ; v4(20.879,-20.65) 21.006,-20.65 21.057,-20.701 21.92,-19.837 v1(21.92,-17.45)
NetP1_10: P1.10 U1.15 | length 59.7
  Top Layer w0.305: P1.10 20.13,-35.09 10.875,-35.09 9.97,-34.186 9.97,-33.455 8.785,-32.269 6.082,-32.269 4.801,-30.988 1.828,-30.988 0.838,-29.998 0.838,-15.971 1.302,-15.508 13.697,-15.508 13.988,-15.799 v1(14.3,-15.799) ; v1(14.3,-15.799) 14.707,-15.799 14.3,-15.392 v1(14.3,-15.799)
  Bottom Layer w0.305: U1.15 12.471,-10.421 13.346,-10.421 14.3,-11.375 v1(14.3,-15.799)
NetR1_1: R1.1 U1.19 | length 14.7
  Top Layer w0.254: v1(8.331,-3.886) 9.093,-3.886 9.601,-3.378 13.375,-3.378 13.894,-3.897 13.894,-7.671 v1(14.224,-8.001)
  Bottom Layer w0.254: v1(8.331,-3.886) 8.331,-4.115 8.65,-4.434 R1.1 ; U1.19 14.204,-7.778 14.427,-8.001 v1(14.224,-8.001)
NetR2_1: R2.1 U2.ADJ | length 26.3
  Top Layer w0.305: R2.1 19.458,-16.46 21.997,-18.999 v1(27.127,-18.999)
  Bottom Layer w0.305: v1(27.127,-18.999) 27.28,-18.847 30.211,-18.847 31.699,-20.335 31.699,-30.023 31.319,-30.403 U2.ADJ
toAIN1: P1.19 U1.21 | length 55.7
  Top Layer w0.254: P1.19 7.873,-33.934 6.742,-32.803 5.861,-32.803 4.58,-31.521 1.607,-31.521 0.305,-30.219 0.305,-15.75 1.081,-14.975 13.476,-14.975 15.138,-13.312 15.138,-11.736 15.75,-11.125 17.272,-11.125 17.272,-10.947 17.653,-11.328 v1(17.272,-11.328)
  Bottom Layer w0.254: U1.21@12.497,-6.409 U1.21 13.588,-6.478 13.97,-6.096 16.993,-6.096 17.475,-6.579 v1@17.475,-11.328
toAIN2: P1.21 U1.22 | length 52.3
  Top Layer w0.254: P1.21 4.471,-32.131 1.499,-32.131 -0.203,-30.429 -0.203,-15.54 0.87,-14.467 13.265,-14.467 14.63,-13.102 14.63,-11.526 15.539,-10.617 16.546,-10.617 17.043,-10.12 17.043,-6.568 15.556,-5.08 v3(14.91,-5.08)
  Bottom Layer w0.254: U1.22 12.439,-5.817 13.513,-5.817 14.249,-5.08 v3(14.91,-5.08)
toBIN1: P1.23 U1.17 | length 48.6
  Top Layer w0.305: P1.23 3.099,-33.299 1.122,-33.299 -1.295,-30.882 -1.295,-15.088 0.418,-13.374 12.813,-13.374 13.538,-12.649 13.538,-10.439 15.85,-8.127 15.85,-7.747 15.926,-7.671 15.875,-7.62 v1(15.773,-7.62)
  Bottom Layer w0.305: U1.17 14.107,-9.078 14.377,-9.347 15.85,-7.874 15.85,-7.747 15.925,-7.671 15.875,-7.62 v1(15.773,-7.62)
toBIN2: P1.24 U1.16 | length 51.3
  Top Layer w0.305: P1.24 3.734,-35.569 4.89,-34.413 4.89,-33.455 4.176,-32.741 1.354,-32.741 -0.737,-30.65 -0.737,-15.319 0.649,-13.933 13.044,-13.933 14.097,-12.881 14.097,-11.305 15.318,-10.084 15.876,-9.526 v5@15.877,-9.525 ; v5(15.875,-9.525) v5@15.877,-9.525 ; v5@15.877,-9.525 16.092,-9.31 16.307,-9.525 v5@15.877,-9.525
  Bottom Layer w0.305: U1.16 13.967,-9.728 14.145,-9.906 15.494,-9.906 v5(15.875,-9.525) ; v5(15.875,-9.525) 16.091,-9.309 16.307,-9.525 v5(15.875,-9.525)
toSGND: R2.2 U2.SCL U2.SDA U2.SGND U2.SYNCI | length 24.6
  Top Layer w0.254: R2.2@16.281,-15.062 16.281,-16.637 18.72,-19.075 20.621,-19.075 21.56,-20.015 28.702,-20.015 v1(28.778,-19.939)
  Bottom Layer w0.254: U2.SYNCI 25.694,-22.314 26.698,-21.311 28.778,-21.311 ; v1(28.778,-19.939) 28.778,-21.311 ; U2.SGND@29.694,-22.403 29.694,-23.403 28.694,-23.403 28.694,-22.403 28.778,-22.319 28.778,-21.311
pads on no net: P1.1 P1.3 P1.5 P1.7 P1.11 P1.12 P1.13 P1.15 P1.16 P1.17 P1.18 P1.22 P2.2 P2.3 P2.4 P2.5 P2.6 P2.7 P2.8 P2.9 P2.10 P2.11 P3.3 P3.4 U2.ADR0 U2.ADR1 U2.EAO U2.EN U2.NC U2.PGD U2.SYNCO U2.TRK
copper on no net:
  other v2: 0,-35.4 35.4,-35.4 0,0 35.4,0

## Polygon pours and split planes (outlines as drawn)
toSGND on Bottom Layer "Bottom Layer - toSGND" (solid, pour order 35): 27.127,-22.748 28.092,-22.748 28.092,-21.742 28.804,-21.742 30.353,-21.742 30.353,-23.825 29.261,-23.825 29.261,-25.781 29.972,-25.781 29.972,-28.956 29.21,-28.956 29.21,-30.861 26.238,-30.861 26.238,-28.981 26.213,-28.956 26.238,-28.931 27.127,-28.931 27.127,-27.864
+5V on Bottom Layer "Bottom Layer - +5V" (solid, pour order 33): 23.165,-27.915 25.324,-27.915 25.324,-30.709 26.086,-30.709 26.086,-32.004 23.139,-32.004 23.139,-27.915
GND on Bottom Layer "Bottom Layer - PGND" (solid, pour order 31): 20.066,-21.717 25.044,-21.717 25.044,-22.86 25.303,-22.86 27.127,-22.86 27.127,-27.686 27.026,-27.788 23.063,-27.788 23.063,-32.131 20.066,-32.131
+12V on Bottom Layer "Bottom Layer - 12V" (solid, pour order 27): 16.002,-21.717 16.002,-26.035 19.304,-26.035 19.304,-21.717
NetL1_1 on Bottom Layer "Bottom Layer - Net L1_1" (solid, pour order 29): 16.027,-26.797 16.027,-32.004 19.304,-32.004 19.304,-26.797
GND on Ground Plane (split plane): 35.801,1.738 36.179,1.606 36.518,1.393 36.8,1.11 37.013,0.771 37.145,0.394 37.193,-0.032 37.193,-35.375 37.145,-35.801 37.013,-36.179 36.8,-36.518 36.518,-36.8 36.179,-37.013 35.801,-37.145 35.375,-37.193 0.032,-37.193 -0.394,-37.145 -0.771,-37.013 -1.11,-36.8 -1.393,-36.518 -1.606,-36.179 -1.738,-35.801 -1.786,-35.375 -1.786,-0.032 -1.738,0.394 -1.606,0.771 -1.393,1.11 -1.11,1.393 -0.771,1.606 -0.394,1.738 0.032,1.786 35.375,1.786
+5V on Power Plane (split plane): 35.801,1.738 36.179,1.606 36.518,1.393 36.8,1.11 37.013,0.771 37.145,0.394 37.193,-0.032 37.193,-35.375 37.145,-35.801 37.013,-36.179 36.8,-36.518 36.518,-36.8 36.179,-37.013 35.801,-37.145 35.375,-37.193 0.032,-37.193 -0.394,-37.145 -0.771,-37.013 -1.11,-36.8 -1.393,-36.518 -1.606,-36.179 -1.738,-35.801 -1.786,-35.375 -1.786,-0.032 -1.738,0.394 -1.606,0.771 -1.393,1.11 -1.11,1.393 -0.771,1.606 -0.394,1.738 0.032,1.786 35.375,1.786

## Silkscreen, mask and mechanical layers (free items; w line width, h text height)
Top Overlay:
  drawing of 1208 lines, arcs and shapes, not listed
  text "Manip. & Cam. v1.0" at 18.339,-8.763 h1.5
  text "Sander Furre" at 18.39,-10.058 h1.5
Mechanical 13:
  lines w0.005: -0.254,0 0,0 0.229,0 ; 0,-0.254 0,-0.051 0,0.051 0,0.254